# Altium PCB CurrSensorPCB.PcbDoc
Units mil, origin at the board's own origin, x right, y up, seen from the top; angles counter-clockwise.
Board outline 2872.5 x 1497.5 mil, 4 copper layers (Top Layer, Layer 1, Layer 2, Bottom Layer), stack 23.756 mil thick; 6 components, 3 nets, 18 pads, 0 vias.
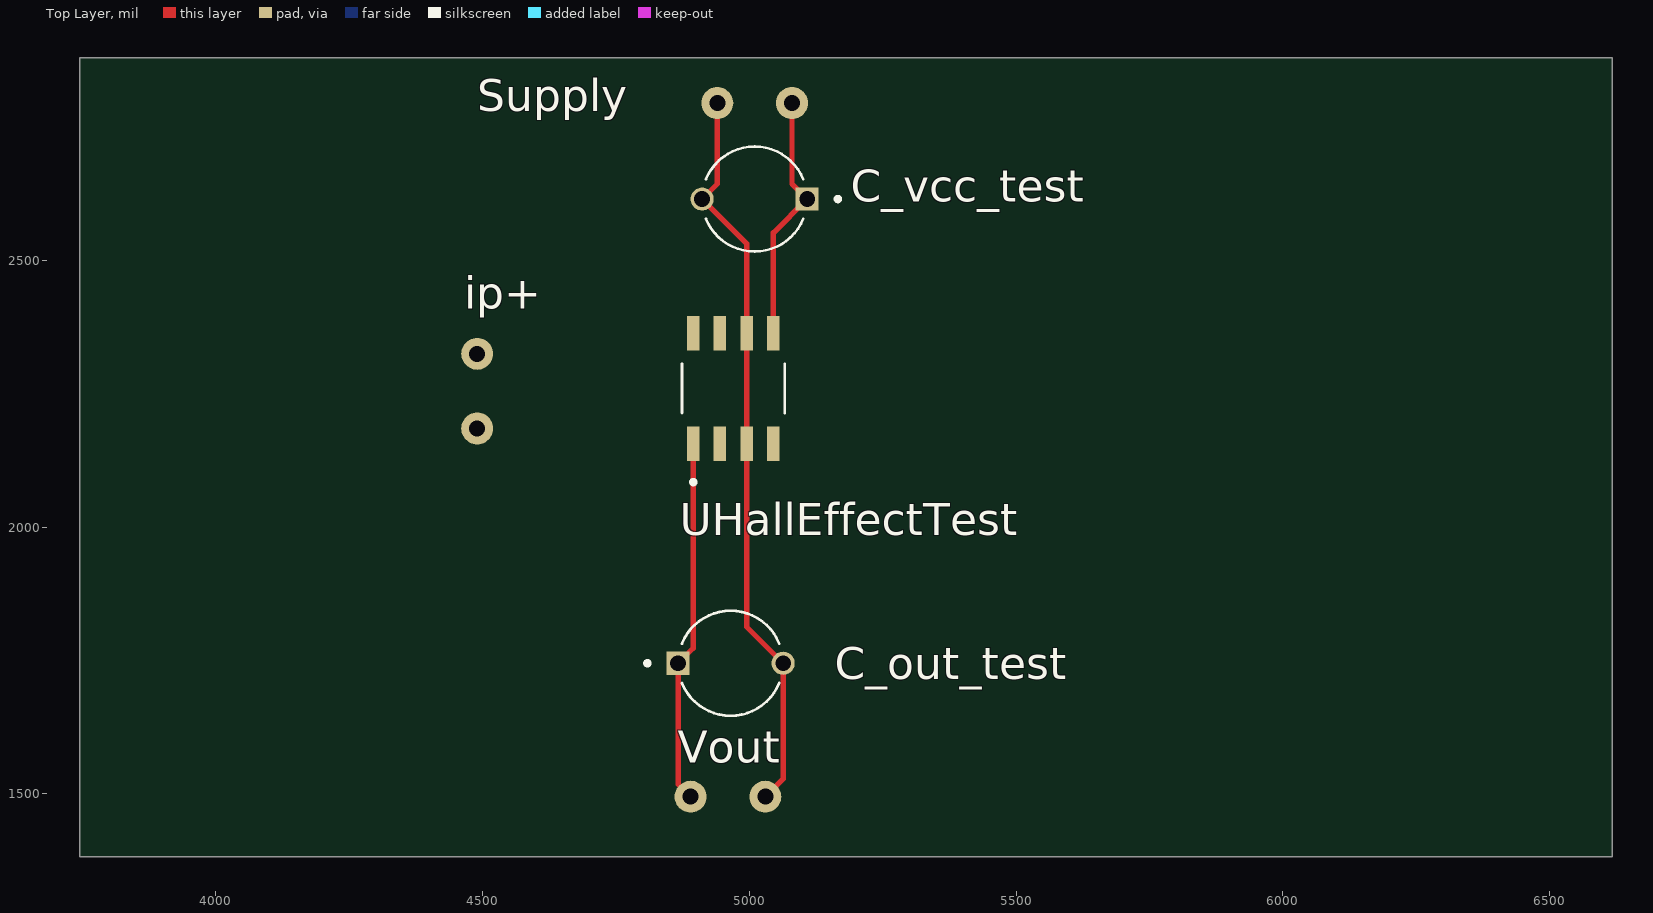
[diagram p0: Top Layer view]
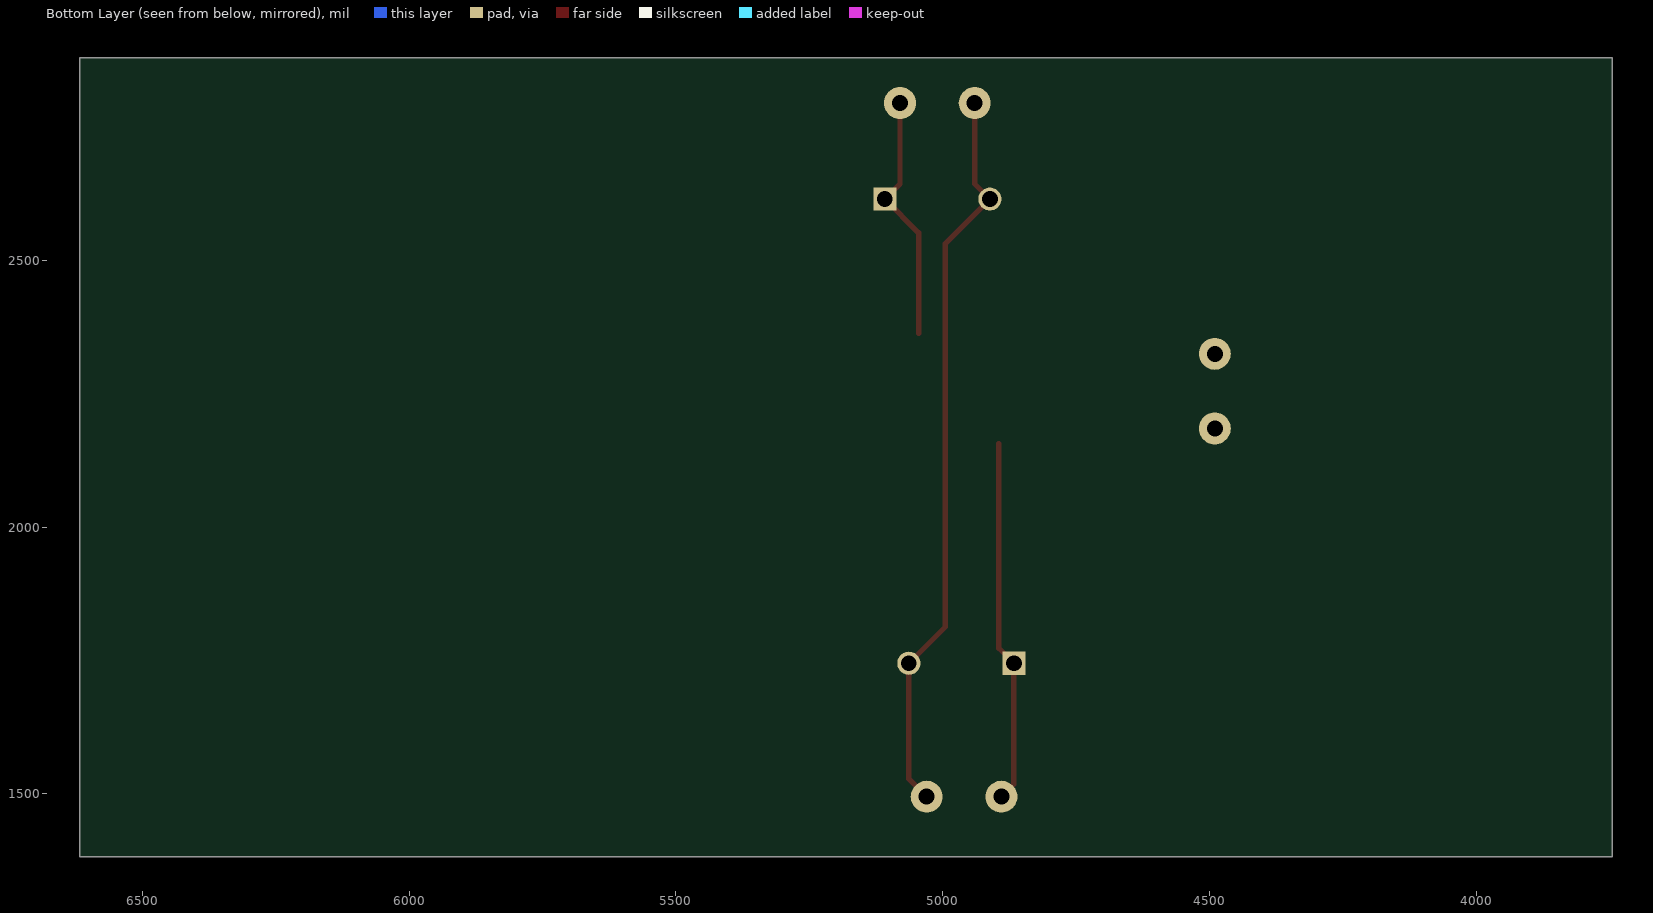
[diagram p1: Bottom Layer view, seen from below]
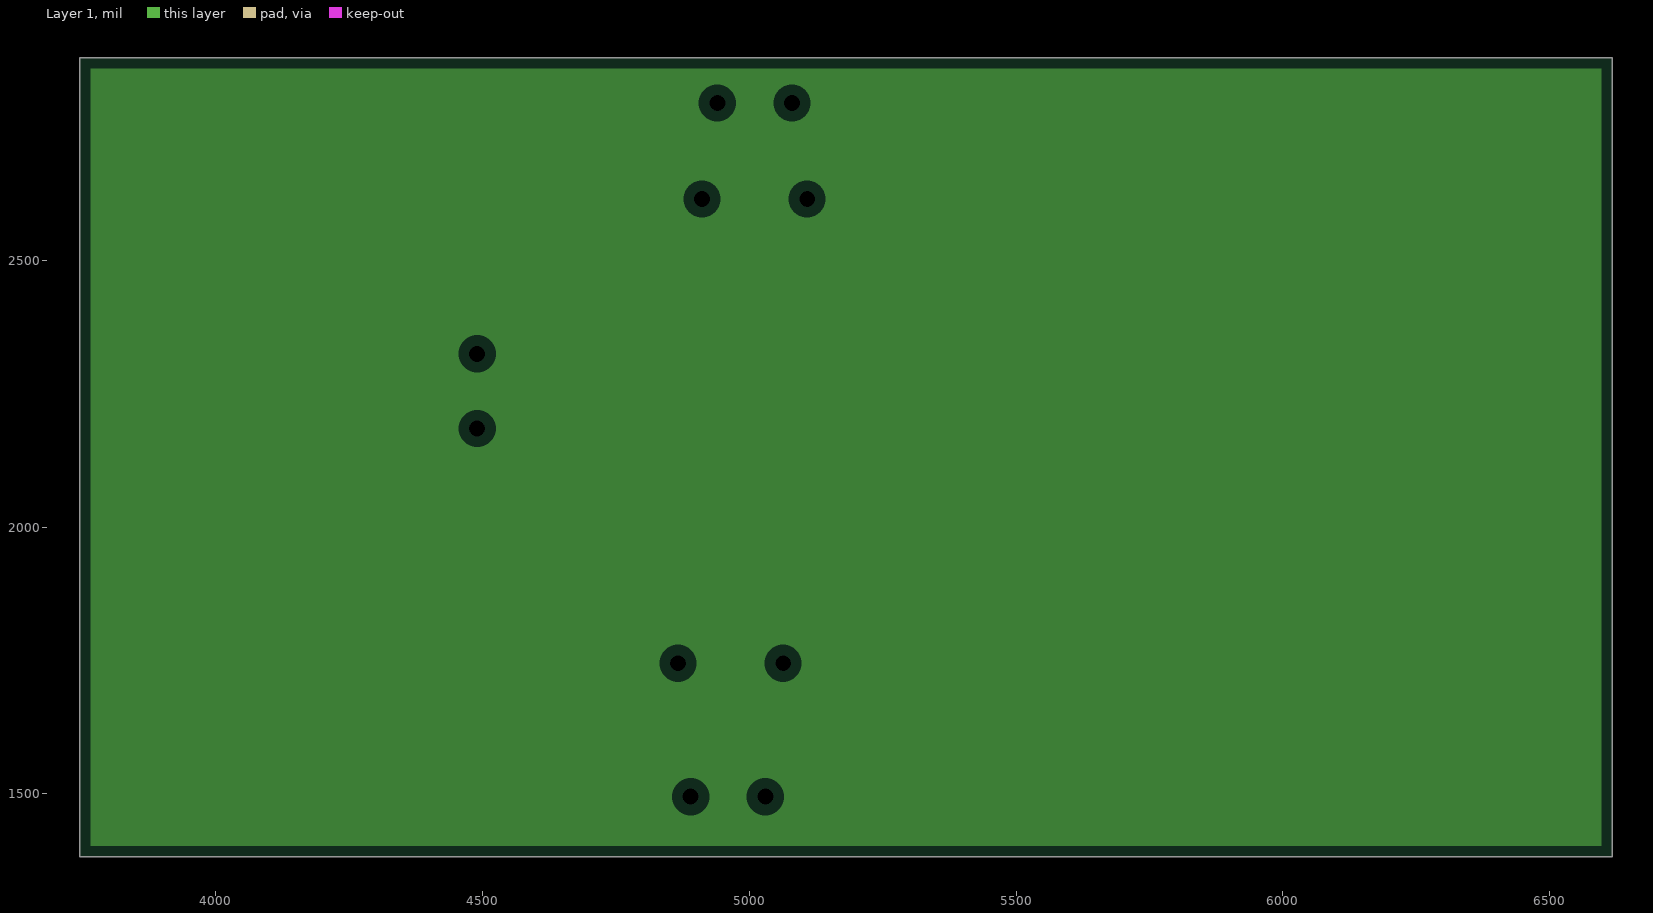
[diagram p2: Layer 1, clearances drawn from the general rule]
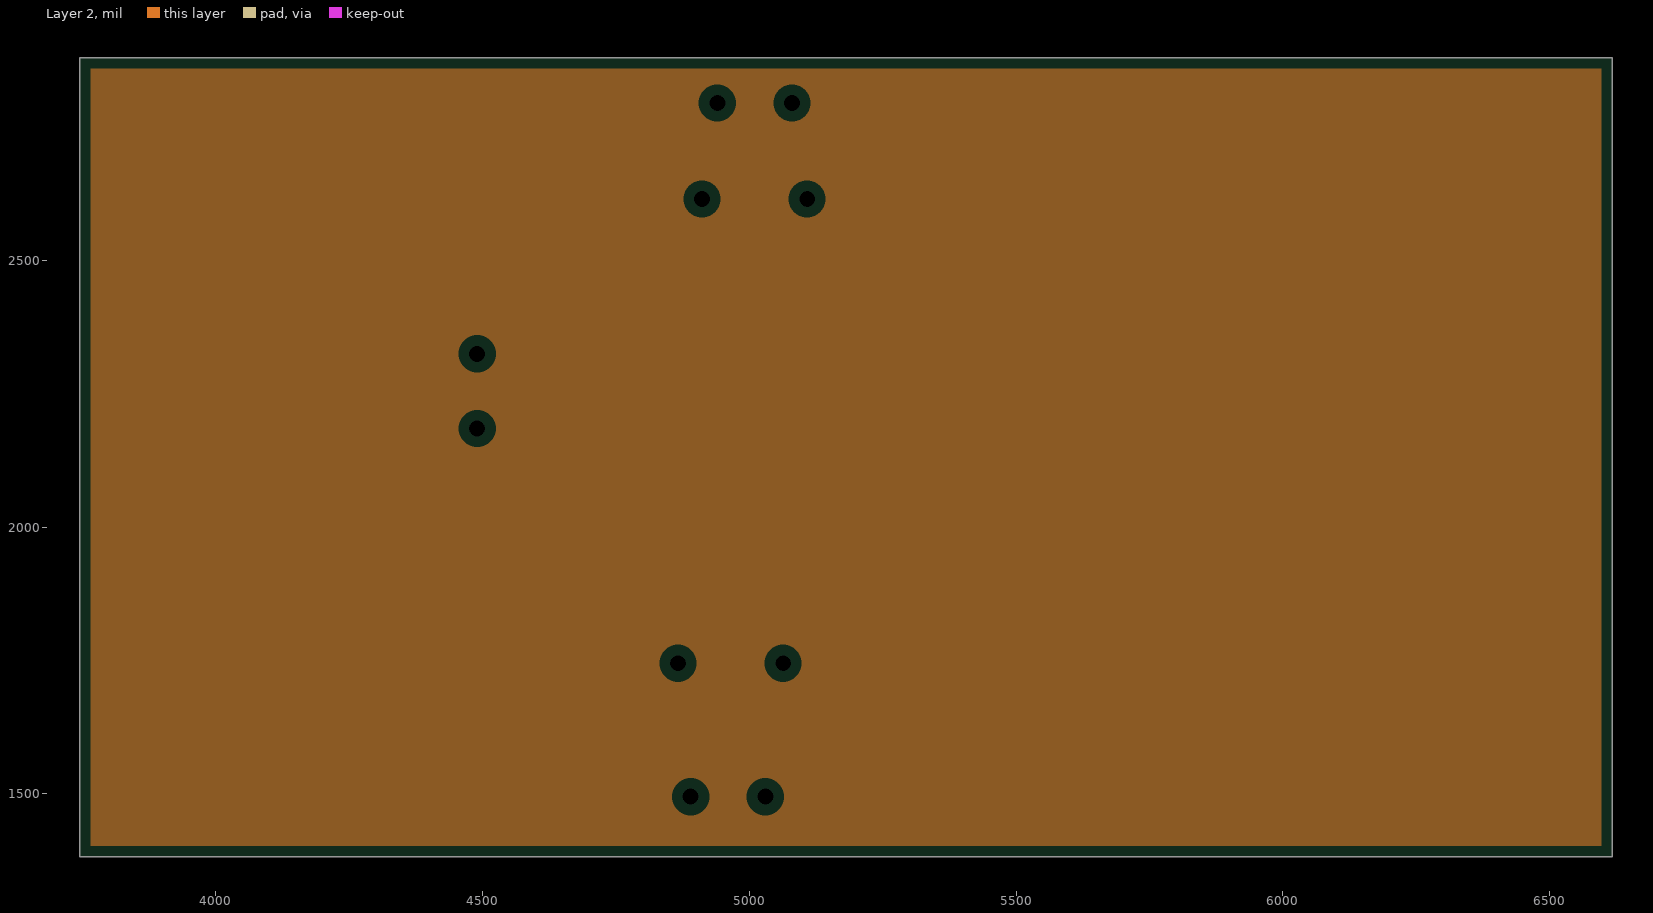
[diagram p3: Layer 2, clearances drawn from the general rule]
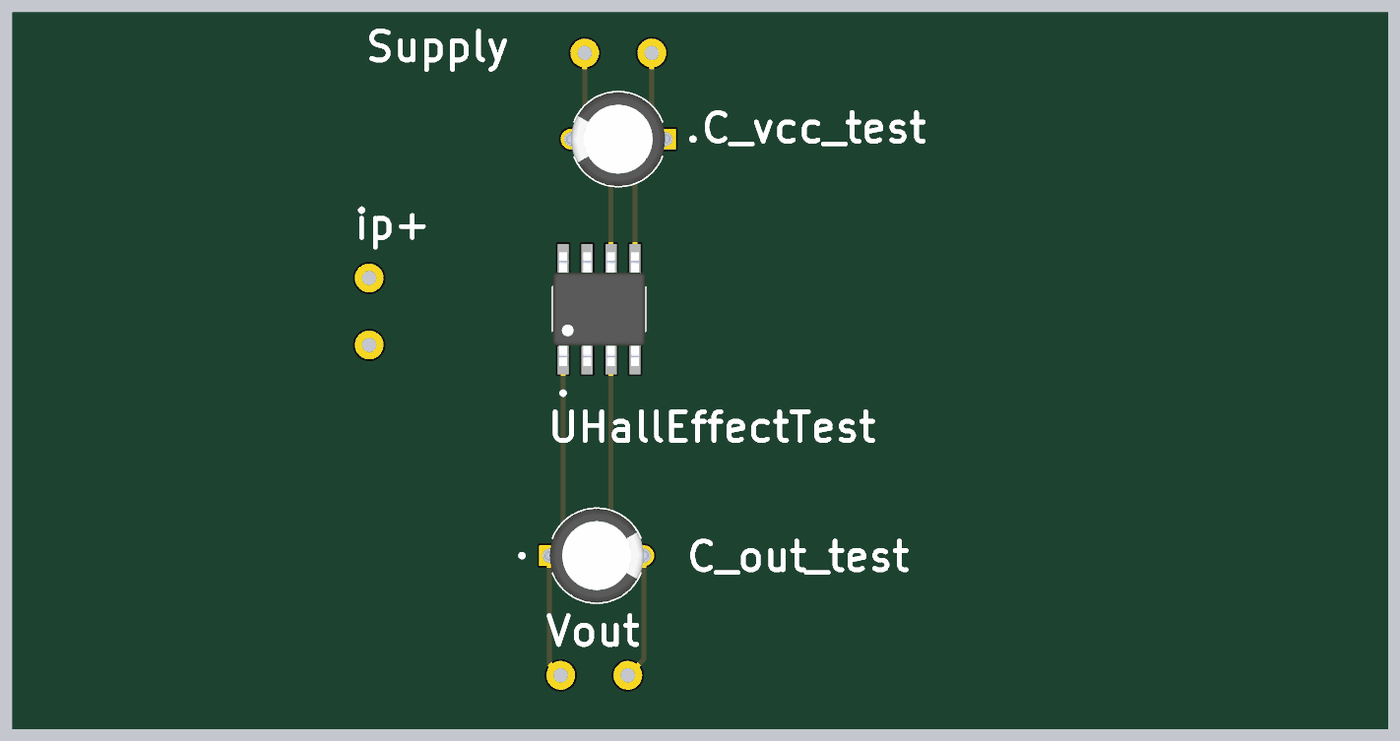
[diagram p4: 3D render of the assembled board from above, using the file's embedded part models]

## Layer stack, top to bottom
Top Solder: solder mask 0.4, Solder Resist, Dk 3.5
Top Layer: signal copper 1.4
Dielectric 2: prepreg 2.8, PP-006, Dk 4.1
Layer 1: plane copper 1.378
Dielectric 1: dielectric 12.6, FR-4, Dk 4.8
Layer 2: plane copper 1.378
Dielectric 3: prepreg 2.8, PP-006, Dk 4.1
Bottom Layer: signal copper 1.4
Bottom Solder: solder mask 0.4, Solder Resist, Dk 3.5

## Board outline
3745,1382.5 6617.5,1382.5 6617.5,2880 3745,2880

## Design rules (kind name [scope] priority, off if disabled: settings)
Clearance [All] p1: gap=10 ignorepadtopadclearanceinfootprint=FALSE
PlaneClearance [All] p1: clearance=20
PlaneConnect [All] p1: planeconnectstyle=Relief reliefexpansion=20 reliefentries=4 reliefconductorwidth=10 reliefairgap=10
PolygonConnect [All] p1: connectstyle=Relief reliefconductorwidth=10 reliefentries=4 polygonreliefangle="90 Angle" airgapwidth=10
RoutingVias [All] p1: holewidth=28 width=50 viastyle="Through Hole" minholewidth=28 minwidth=50 maxholewidth=28 maxwidth=50
SolderMaskExpansion [All] p1: expansion=4 istentingtop=FALSE
SupplyNets "Schematic Supply Nets_5" [InNet('GND')] p1: voltage=0.000
SupplyNets "Schematic Supply Nets_1" [InNet('3V3')] p2: voltage=0.000
Width [All] p1: maxlimit=10 minlimit=10 preferedwidth=10
28 further rules are at their usual default settings.

## Components (designator, comment, footprint, x,y, rotation, side; value= is the part's Value field where it differs from the comment)
C_out_test "EEUFS1J270B" CAPPRD500W50D500H1100 4965,1745 r0 top
C_vcc_test "EEUFS1J270B" CAPPRD500W50D500H1100 5010,2615 r180 top
ip+ "IP+" PCBComponent_1 4490,2185 r0 top
Supply "SUPPLY" PCBComponent_1 4940,2795 r270 top
UHallEffectTest "MLX91208LDC-CAV-001-SP" SOIC127P602X173-8N 4970,2260 r90 top
Vout "VOUT" PCBComponent_1 4890,1495 r270 top

## Footprints (in the part's own frame and the unit in brackets; to place one, negate y for a bottom-side part, rotate by r counter-clockwise, add the part's x,y. Pads: shape width x height; smd on the part's side, far side on the other; paste and mask are expansions set on the pad)
CAPPRD500W50D500H1100 [mm]
  round 1.1 hole 0.75: N(2.5,0)
  rect 1.1x1.1 / inner round 1.1 / far side rect 1.1x1.1 hole 0.75: P(-2.5,0)
  silkscreen extent -4.06,-2.5 2.32,2.5, body extent -2.75,-2.5 2.75,2.5, height 12.5
PCBComponent_1 [mil]
  round 60 hole 30: 1(0,0) 2(0,140)
SOIC127P602X173-8N [mm]
  rect 1.64x0.59 smd: 1(-2.635,1.905) 2(-2.635,0.635) 3(-2.635,-0.635) 4(-2.635,-1.905) 5(2.635,-1.905) 6(2.635,-0.635) 7(2.635,0.635) 8(2.635,1.905)
  silkscreen extent -4.56,-2.45 1.17,2.45, body extent -3.01,-2.44 3.01,2.44, height 1.73

## Part data
C_out_test C_vcc_test: "CAP ALUM 27UF 20% 63V THRU HOLE", Package="RADIAL-2 Panasonic", Check_prices=https://www.snapeda.com/parts/EEU-FS1J270B/Panasonic+Electronic+Components/view-part/?ref=eda, MF="Panasonic Electronic Components", MP=EEU-FS1J270B, SnapEDA_Link=https://www.snapeda.com/parts/EEU-FS1J270B/Panasonic+Electronic+Components/view-part/?ref=snap
ip+ Supply Vout: library part Component_1
UHallEffectTest: Package=None, Availability=Unavailable, MP=MLX91208LDC-CAV-001-SP, Price=None

## Nets (pads, with @x,y where several pads share a name; then routed paths per layer and width w, separated by ;. In a path a pad name is that pad's centre, name@x,y a point inside that pad or via, vN(x,y) a via of type N, cw(c..) or ccw(c..) an arc to the next point about the centre after c; other vN are vias at no path point)
3V3: C_vcc_test.P Supply.2 UHallEffectTest.5 | length 469.3
  Top Layer w10: UHallEffectTest.5 5045,2551.57 C_vcc_test.P 5080,2643.43 Supply.2
GND: C_out_test.N C_vcc_test.N Supply.1 UHallEffectTest.3 UHallEffectTest.6 Vout.2 | length 1388.5
  Top Layer w10: Supply.1 4940,2643.43 C_vcc_test.N 4995,2531.57 UHallEffectTest.6 UHallEffectTest.3 4995,1813.43 C_out_test.N 5063.43,1528.43 Vout.2
NetC_out_test_P: C_out_test.P UHallEffectTest.1 Vout.1 | length 682.7
  Top Layer w10: Vout.1 4866.57,1518.43 C_out_test.P 4895,1773.43 UHallEffectTest.1
pads on no net: ip+.1 ip+.2 UHallEffectTest.2 UHallEffectTest.4 UHallEffectTest.7 UHallEffectTest.8

## Polygon pours and split planes (outlines as drawn)
no net on Layer 1 (split plane): 6597.4,1402.6 3765.1,1402.6 3765.1,2859.9 6597.4,2859.9
no net on Layer 2 (split plane): 6597.4,1402.6 3765.1,1402.6 3765.1,2859.9 6597.4,2859.9